# Altium PCB Arduino_Shield.PcbDoc
Units mil, origin at the board's own origin, x right, y up, seen from the top; angles counter-clockwise.
Board outline 2663 x 2733 mil, 4 copper layers (Component Side, gnd1, gnd2, Solder Side), stack 33.234 mil thick; 47 components, 62 nets, 197 pads, 35 vias.
Unrouted connection lines stored in the file: 5.
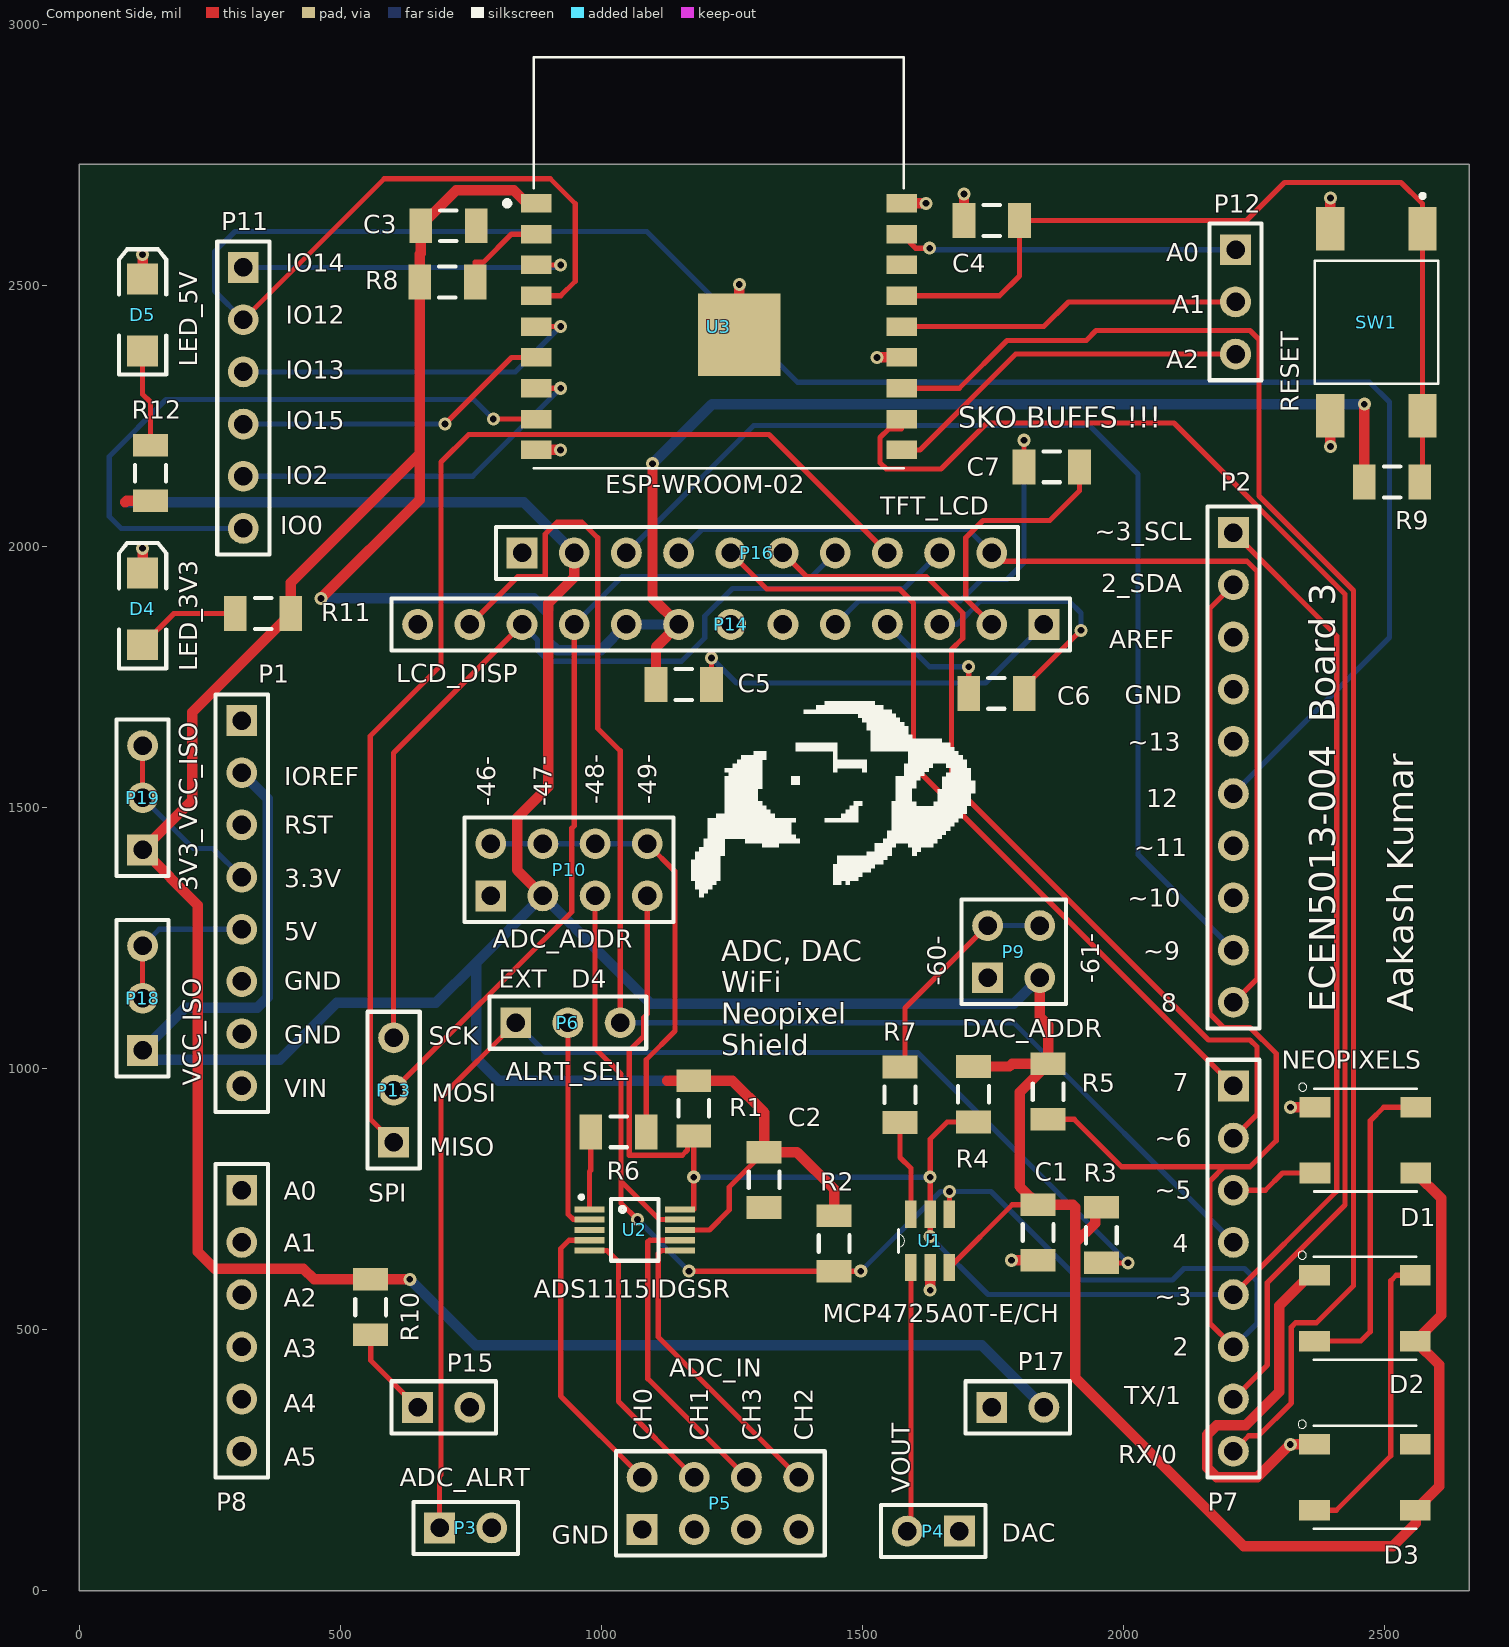
[diagram p0: Component Side view]
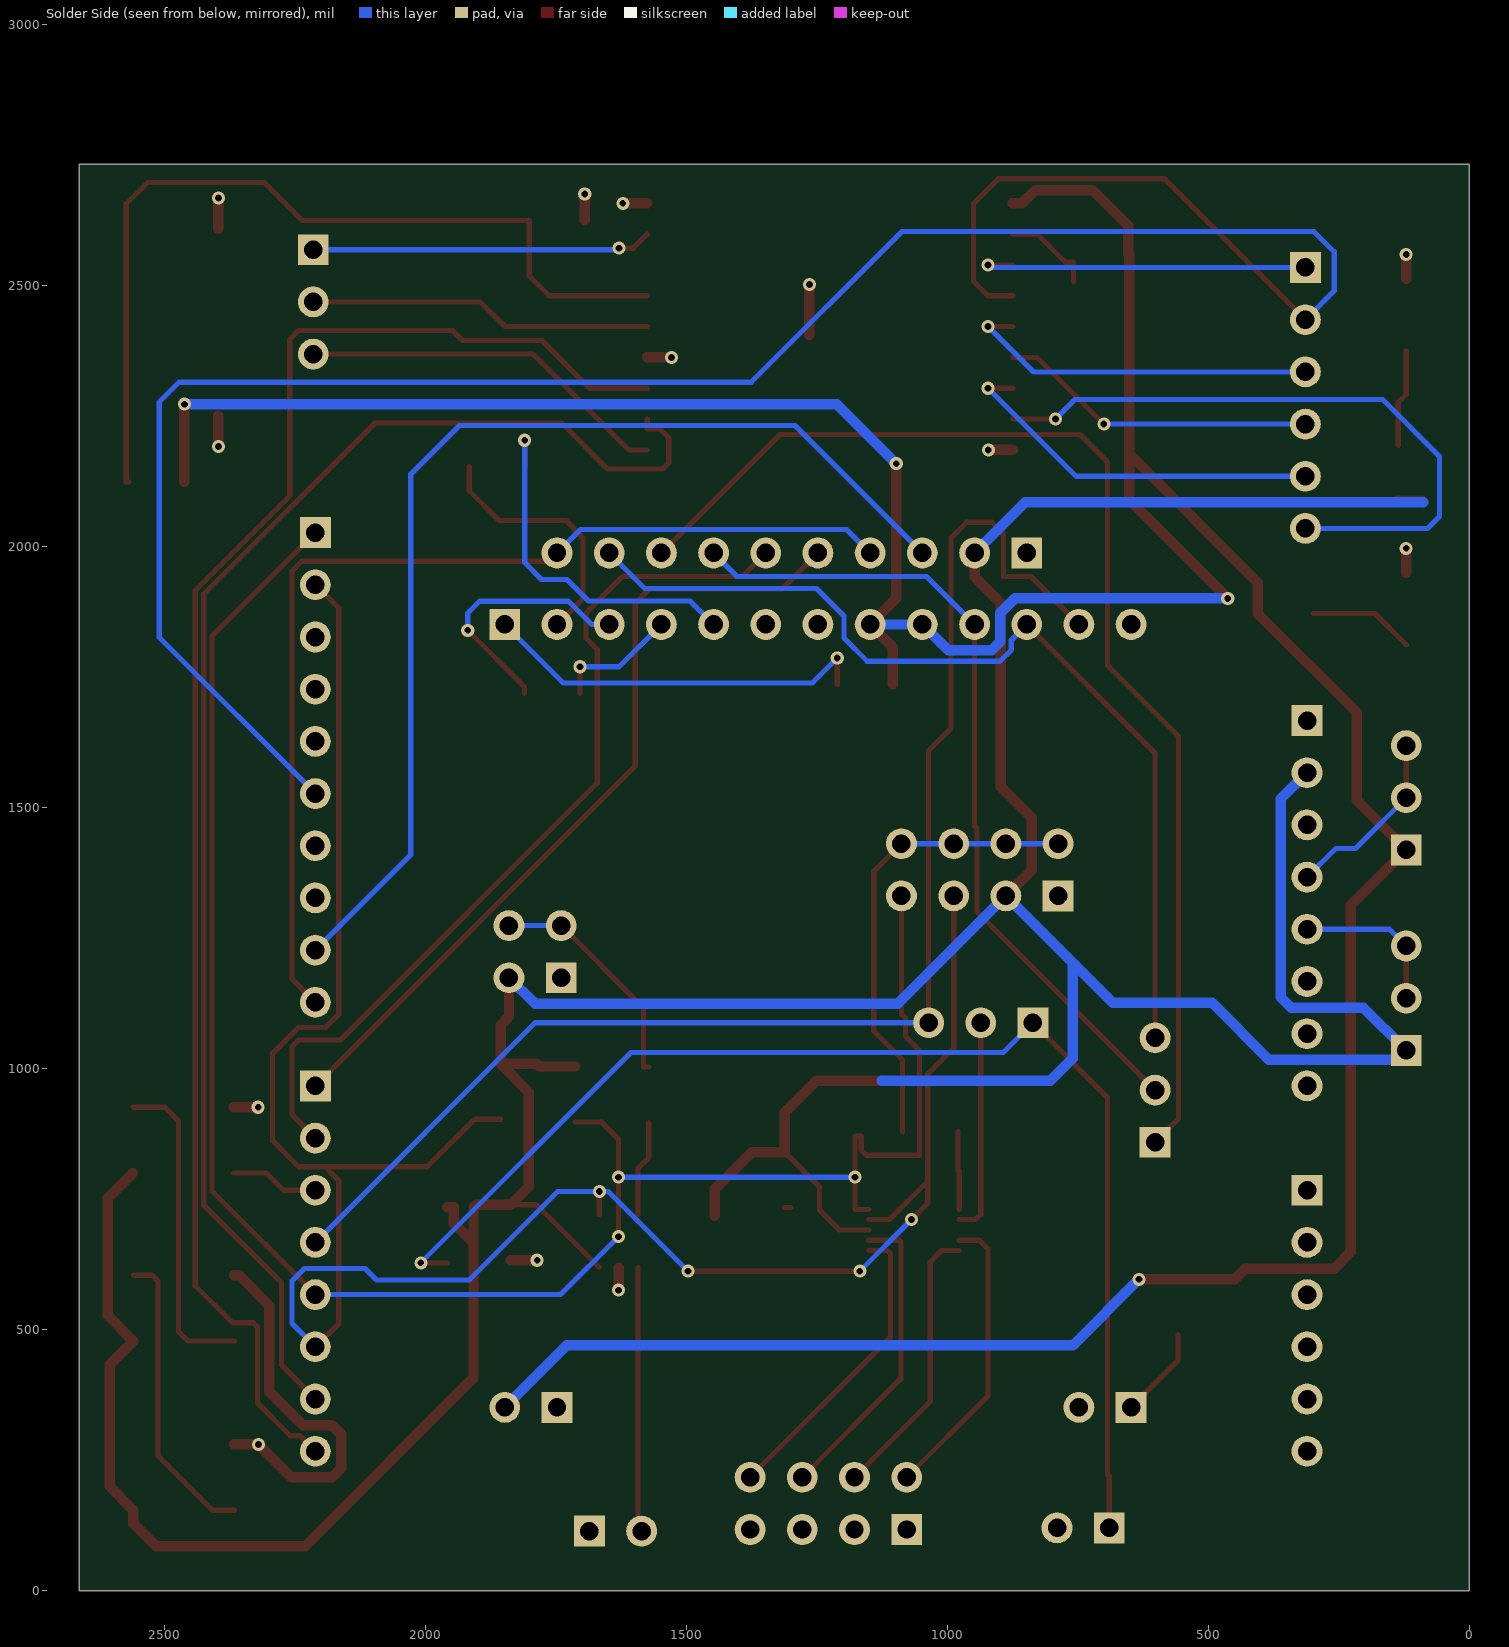
[diagram p1: Solder Side view, seen from below]
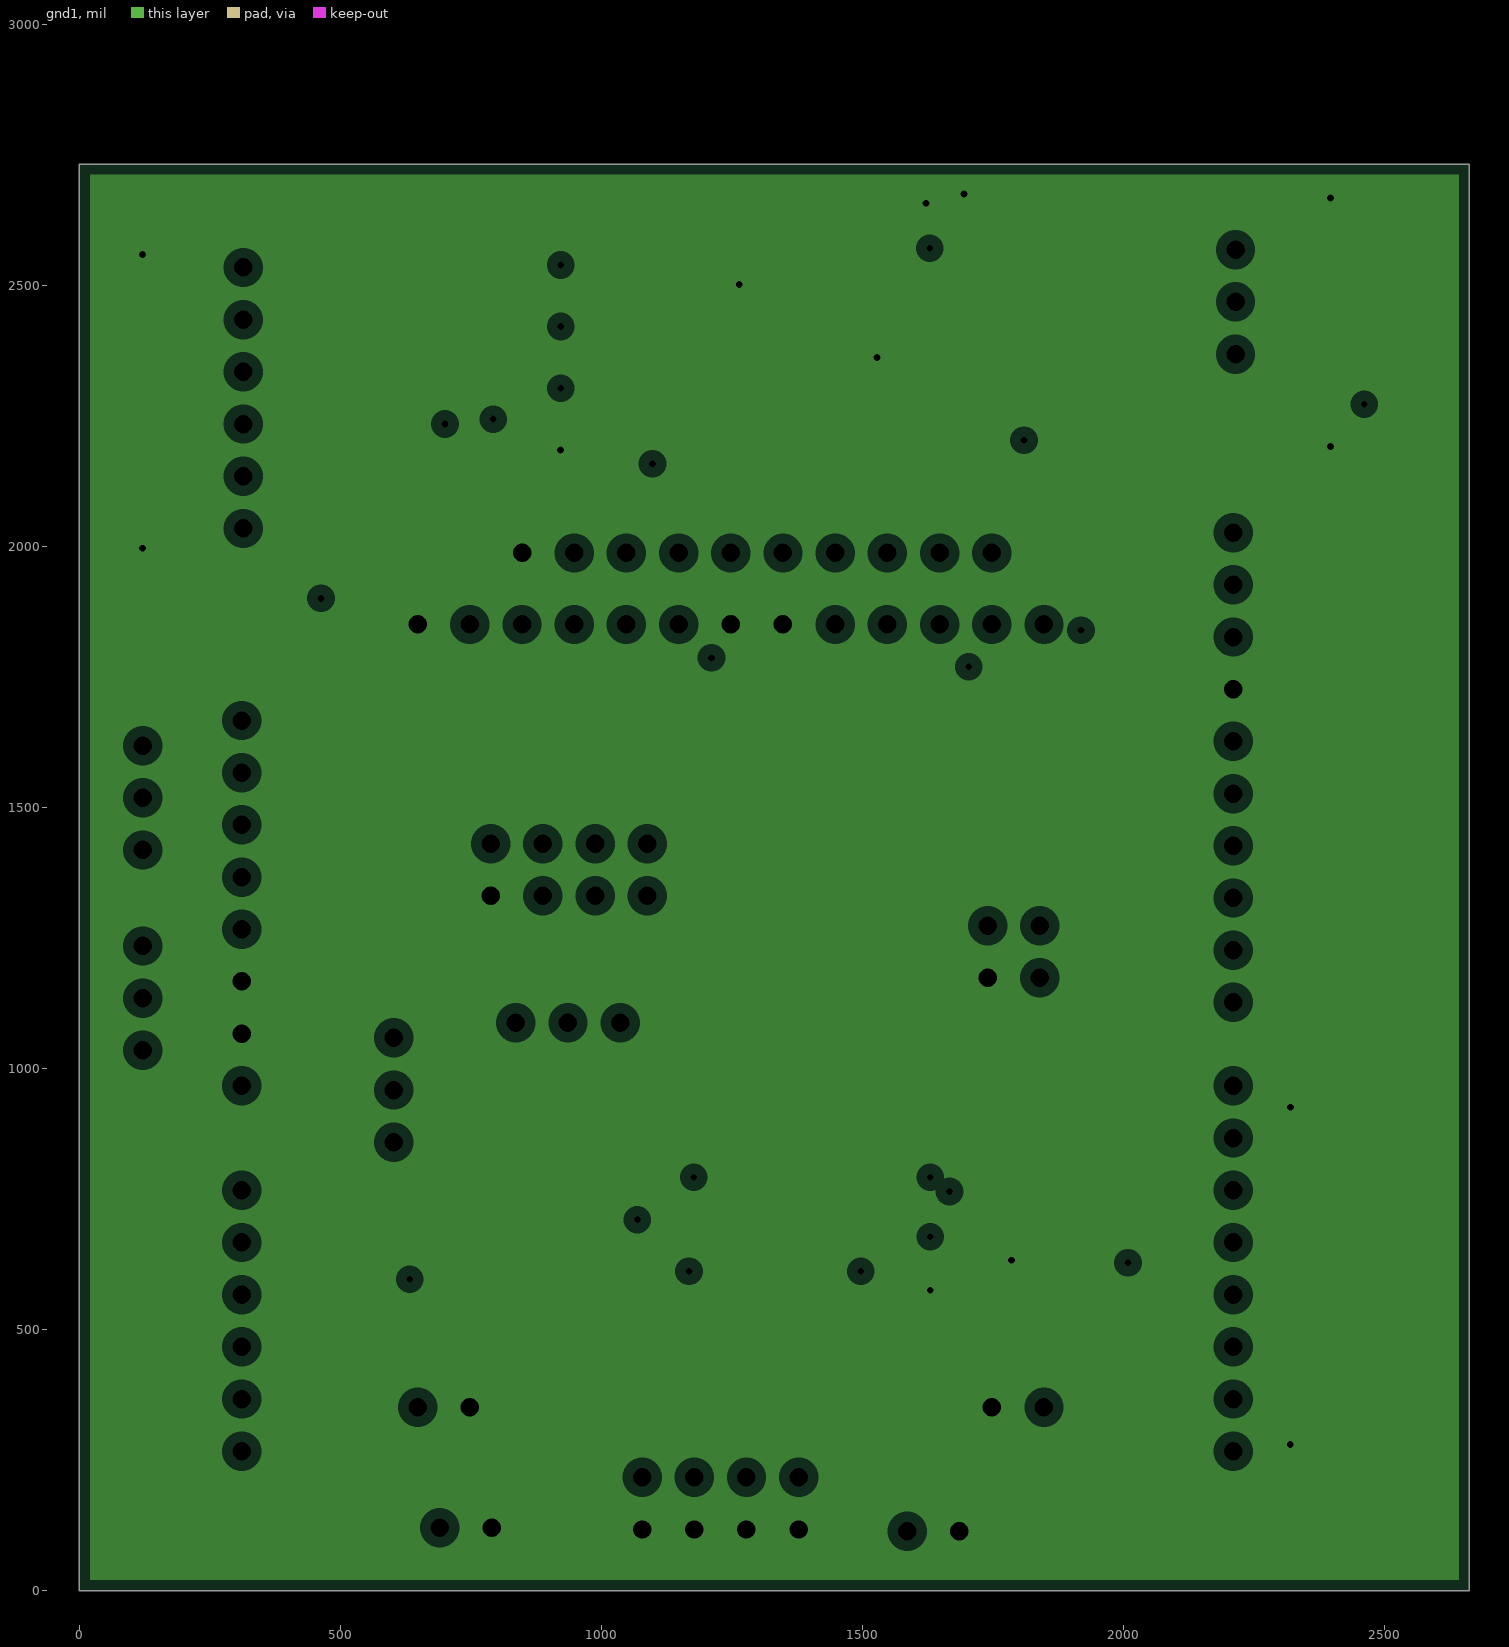
[diagram p2: gnd1, clearances drawn from the general rule]
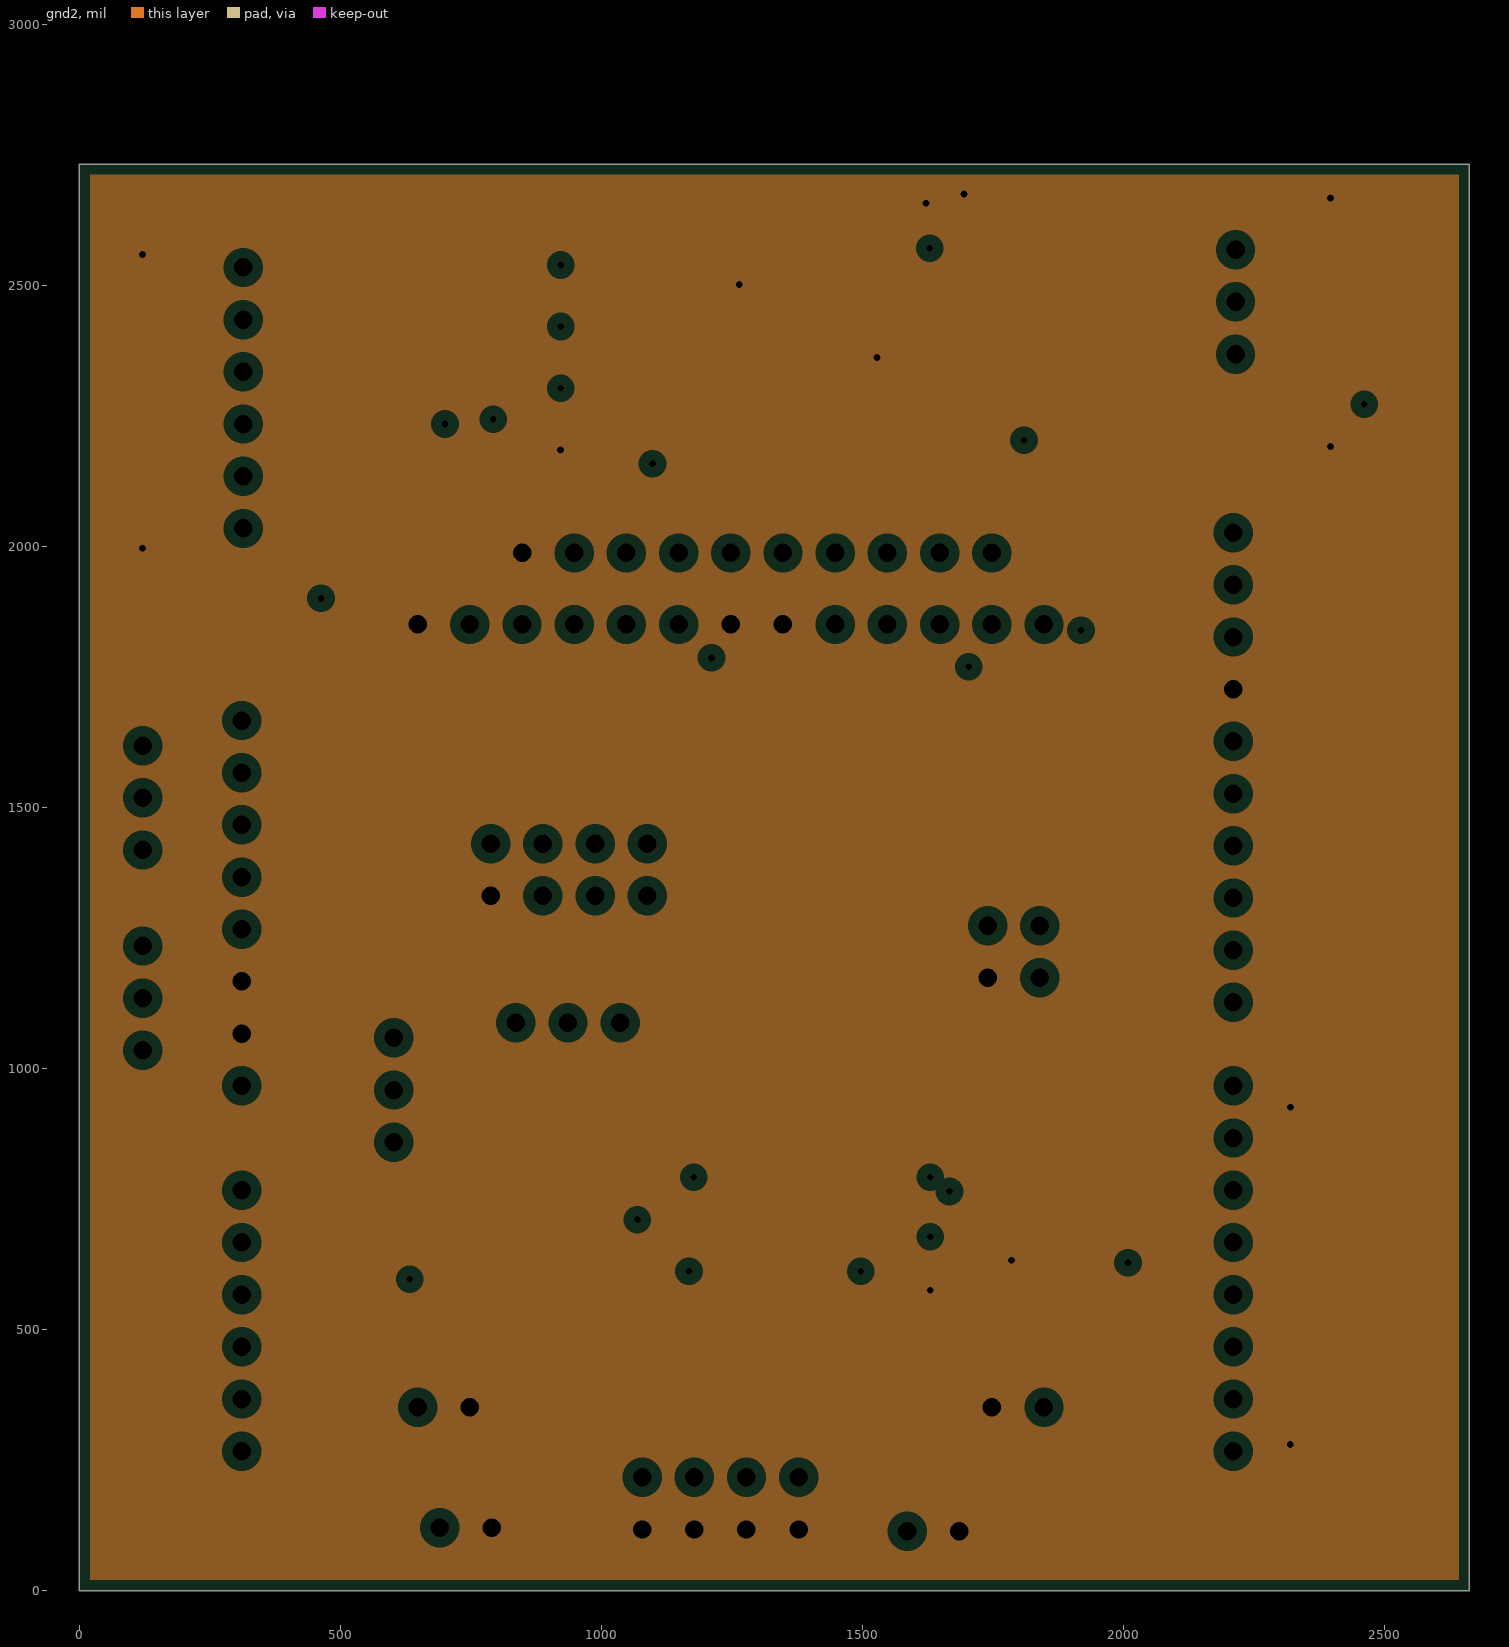
[diagram p3: gnd2, clearances drawn from the general rule]

## Layer stack, top to bottom
Top Solder: solder mask 0.4, Solder Resist, Dk 3.5
Component Side: signal copper 1.4
Dielectric 1: core 12.6, FR-4, Dk 4.8
gnd1: plane copper 1.417, net GND
Dielectric 3: prepreg 5, Dk 4.2
gnd2: plane copper 1.417, net GND
Dielectric 4: core 10, Dk 4.2
Solder Side: signal copper 1.4
Bottom Solder: solder mask 0.4, Solder Resist, Dk 3.5

## Board outline
0,0 2663,0 2663,2733 0,2733

## Design rules (kind name [scope] priority, off if disabled: settings)
Clearance [All] p1: gap=10 ignorepadtopadclearanceinfootprint=FALSE except(0: Arc-Hole Track-Hole SMDPad-Hole THPad-Hole Via-Hole Fill-Hole Poly-Hole Region-Hole Text-Hole; 6: Arc-Arc Arc-Track Arc-SMDPad Track-Track Track-SMDPad SMDPad-SMDPad)
PlaneClearance [All] p1: clearance=20
PlaneConnect [All] p1: planeconnectstyle=Relief reliefexpansion=20 reliefentries=4 reliefconductorwidth=10 reliefairgap=10
PolygonConnect [All] p1: connectstyle=Relief reliefconductorwidth=10 reliefentries=4 polygonreliefangle="90 Angle" airgapwidth=10
RoutingVias [All] p1: holewidth=13 width=25 viastyle="Through Hole" minholewidth=13 minwidth=25 maxholewidth=13 maxwidth=25
SolderMaskExpansion [All] p1: expansion=4
Width Width_1 [(InNet('3V3_VCC') OR InNet('VCC') OR InNet('GND') OR InNet('VIN'))] p1: maxlimit=20 minlimit=10 preferedwidth=20
Width [All] p2: maxlimit=10 minlimit=6 preferedwidth=10
28 further rules are at their usual default settings.

## Components (designator, comment, footprint, x,y, rotation, side; value= is the part's Value field where it differs from the comment)
C1 "Cap Semi" C1206 1837,686 r90 top value=22uF
C2 "Cap Semi" C1206 1312,787 r90 top value=22uF
C3 "Cap Semi" C1206 707,2615 r180 top value=22uF
C4 "Cap Semi" C1206 1748,2625 r0 top value=10uF
C5 "Cap Semi" C1206 1157.85,1736 r180 top value=1uF
C6 "Cap Semi" C1206 1757,1719 r180 top value=1uF
C7 "Cap Semi" C1206 1863,2153 r0 top value=1uF
D1 "LED_RGBW" *LED_IN-PI554FCH 2464,863 r0 top
D2 "LED_RGBW" *LED_IN-PI554FCH 2463,541 r0 top
D3 "LED_RGBW" *LED_IN-PI554FCH 2463,217 r0 top
D4 "LED_3V3" 3.2X1.6X1.1 121,1881 r90 top
D5 "LED_5V" 3.2X1.6X1.1 121,2444 r90 top
P1 "P4" HDR1X8 311,1667 r270 top
P2 "P1" HDR1X10 2211,2027 r270 top
P3 "ADC_ALRT" HDR1X2 690,120 r0 top
P4 "DAC" HDR1X2 1686,114 r180 top
P5 "ADC_IN" HDR2X4 1078,117 r0 top
P6 "ALRT_SEL" HDR1X3 836,1088 r0 top
P7 "P2" HDR1X8 2211,967 r270 top
P8 "P3" HDR1X6 311,767 r270 top
P9 "DAC_ADDR" HDR2X2 1740,1174 r0 top
P10 "ADC_ADDR" HDR2X4 788,1331 r0 top
P11 "Header 6" HDR1X6 314,2535 r270 top
P12 "Header 3" HDR1X3 2215,2569 r270 top
P13 "SPI" HDR1X3 602,859 r90 top
P14 "LCD_DISP" HDR1X13 1848,1851 r180 top
P15 "Header 2" HDR1X2 648,351 r0 top
P16 "TFT_LCD" HDR1X10 848,1988 r0 top
P17 "Header 2" HDR1X2 1748,351 r0 top
P18 "VCC_ISO" HDR1X3 121,1035 r90 top
P19 "3V3_VCC_ISO" HDR1X3 121,1419 r90 top
R1 "Res3" C1206 1177,924 r90 top value=10K
R2 "Res3" C1206 1446,665 r90 top value=10K
R3 "Res3" C1206 1958,681 r90 top value=10K
R4 "Res3" C1206 1713,951 r90 top value=10K
R5 "Res3" C1206 1856,956 r90 top value=10K
R6 "Res3" C1206 1033,879 r0 top value=10K
R7 "Res3" C1206 1572,950 r270 top value=10K
R8 "Res3" C1206 705,2507 r180 top value=10K
R9 "Res3" C1206 2515,2124 r180 top value=1k
R10 "Res3" C1206 558,543.15 r270 top value=28
R11 "Res3" C1206 352,1872 r0 top value=1K
R12 "Res3" C1206 136,2141 r270 top value=1K
SW1 "RESET" *TE_FSM4JSMA 2485,2430 r270 top
U1 "MCP4725A0T-E/CH" *SOT95P270X145-6N 1630,670 r90 top
U2 "ADS1115IDGSR" *SOP50P490X110-10N 1064,691 r0 top
U3 "ESP-WROOM-02" *MODULE_ESP-WROOM-02 1225,2465 r0 top

## Footprints (in the part's own frame and the unit in brackets; to place one, negate y for a bottom-side part, rotate by r counter-clockwise, add the part's x,y. Pads: shape width x height; smd on the part's side, far side on the other; paste and mask are expansions set on the pad)
3.2X1.6X1.1 [mm] "SMT LED; 2 Flat Leads"
  rect 1.5x1.5 smd: 1(-1.75,0) 2(1.75,0)
  silkscreen extent -2.9,-1.15 3.2,1.15
*LED_IN-PI554FCH [mm]
  rect 1.5x1 smd: 1(-2.45,1.6) 2(-2.45,-1.6) 3(2.45,-1.6) 4(2.45,1.6)
  silkscreen extent -3.25,-2.5 2.5,2.78
*MODULE_ESP-WROOM-02 [mm]
  rect 1.485x0.9 smd: 1(-8.892,4.9) 2(-8.892,3.4) 3(-8.892,1.9) 4(-8.892,0.4) 5(-8.892,-1.1) 6(-8.892,-2.6) 7(-8.892,-4.1) 8(-8.892,-5.6) 9(-8.892,-7.1) 10(8.892,-7.1) 11(8.892,-5.6) 12(8.892,-4.1) 13(8.892,-2.6) 14(8.892,-1.1) 15(8.892,0.4) 16(8.892,1.9) 17(8.892,3.4) 18(8.892,4.9)
  rect 4x4 smd: 19(1,-1.5)
  silkscreen extent -10.35,-8 9,12
*SOP50P490X110-10N [mm]
  rect 1.45x0.3 smd: 1(-2.2,1)
  rect 1.47x0.3 smd: 2(-2.2,0.5) 3(-2.2,0) 4(-2.2,-0.5) 5(-2.2,-1) 6(2.2,-1) 7(2.2,-0.5) 8(2.2,0) 9(2.2,0.5) 10(2.2,1)
  silkscreen extent -2.68,-1.5 1.15,1.68
*SOT95P270X145-6N [mil]
  rect 52x22 smd: 1(-51,37) 2(-51,0) 3(-51,-37) 4(51,-37) 5(51,0) 6(51,37)
  silkscreen extent -22,49 22,61
*TE_FSM4JSMA [mm]
  rect 2.1x1.38 smd: 1(-4.55,2.24) 2(4.55,2.24) 3(-4.55,-2.24) 4(4.55,-2.24)
  silkscreen extent -6.25,-3 3,3
C1206 [mm] "Chip Capacitor, Body 3.2x1.6mm, IPC High Density"
  rect 1.1x1.7 smd: 1(-1.35,0) 2(1.35,0)
  silkscreen extent -0.4,-0.75 0.4,0.75, body extent -1.7,-0.9 1.7,0.9, height 1.3
HDR1X2 [mm] "Connector; Header; 2 Position"
  rect 1.5x1.5 hole 0.9: 1(0,0)
  round 1.5 hole 0.9: 2(2.54,0)
  silkscreen extent -1.27,-1.27 3.81,1.27
HDR1X3 [mm] "Connector; Header; 3 Position"
  rect 1.5x1.5 hole 0.9: 1(0,0)
  round 1.5 hole 0.9: 2(2.54,0) 3(5.08,0)
  silkscreen extent -1.27,-1.27 6.35,1.27
HDR1X6 [mm] "Connector; Header; 6 Position"
  rect 1.5x1.5 hole 0.9: 1(0,0)
  round 1.5 hole 0.9: 2(2.54,0) 3(5.08,0) 4(7.62,0) 5(10.16,0) 6(12.7,0)
  silkscreen extent -1.27,-1.27 13.97,1.27
HDR1X8 [mm] "Connector; Header; 8 Position"
  rect 1.5x1.5 hole 0.9: 1(0,0)
  round 1.5 hole 0.9: 2(2.54,0) 3(5.08,0) 4(7.62,0) 5(10.16,0) 6(12.7,0) 7(15.24,0) 8(17.78,0)
  silkscreen extent -1.27,-1.27 19.05,1.27
HDR1X10 [mm] "Connector; Header; 10 Position"
  rect 1.5x1.5 hole 0.9: 1(0,0)
  round 1.5 hole 0.9: 2(2.54,0) 3(5.08,0) 4(7.62,0) 5(10.16,0) 6(12.7,0) 7(15.24,0) 8(17.78,0) 9(20.32,0) 10(22.86,0)
  silkscreen extent -1.27,-1.27 24.13,1.27
HDR1X13 [mm] "Connector; Header; 13 Position"
  rect 1.5x1.5 hole 0.9: 1(0,0)
  round 1.5 hole 0.9: 2(2.54,0) 3(5.08,0) 4(7.62,0) 5(10.16,0) 6(12.7,0) 7(15.24,0) 8(17.78,0) 9(20.32,0) 10(22.86,0) 11(25.4,0) 12(27.94,0) 13(30.48,0)
  silkscreen extent -1.27,-1.27 31.75,1.27
HDR2X2 [mm] "Connector; Header; 2x2 Position"
  rect 1.5x1.5 hole 0.9: 1(0,0)
  round 1.5 hole 0.9: 2(0,2.54) 3(2.54,0) 4(2.54,2.54)
  silkscreen extent -1.27,-1.27 3.81,3.81
HDR2X4 [mm] "Connector; Header; 4x2 Position"
  rect 1.5x1.5 hole 0.9: 1(0,0)
  round 1.5 hole 0.9: 2(0,2.54) 3(2.54,0) 4(2.54,2.54) 5(5.08,0) 6(5.08,2.54) 7(7.62,0) 8(7.62,2.54)
  silkscreen extent -1.27,-1.27 8.89,3.81

## Part data
C1 C2 C3 C4: "Capacitor (Semiconductor SIM Model)", DigiKeyPartNo=1276-1079-1-ND, LatestRevisionDate=29-May-2009, LatestRevisionNote="IPC-7351 Footprint Added.", PackageDescription="Chip Capacitor", PackageReference=C1206, Published=8-Jun-2000, Publisher="Altium Limited"
C5 C6 C7: "Capacitor (Semiconductor SIM Model)", DigiKeyPartNo=732-7692-1-ND, LatestRevisionDate=29-May-2009, LatestRevisionNote="IPC-7351 Footprint Added.", PackageDescription="Chip Capacitor", PackageReference=C1206, Published=8-Jun-2000, Publisher="Altium Limited"
D1 D2 D3: library part IN-PI554FCH, "5050RGB with integrated IC built in 4 PIN Viewing angle: 120 degrees", DigiKeyPartNo=1830-1209-1-ND, Package="SMD-4 Innolux", Availability=Unavailable, MF=Inolux, MP=IN-PI554FCH, Price=None, SnapEDA_Link=https://www.snapeda.com/parts/IN-PI554FCH/Inolux/view-part/?ref=snap
D4 D5: library part LED2, "Typical RED, GREEN, YELLOW, AMBER GaAs LED", LatestRevisionDate=17-Jul-2002, LatestRevisionNote="Re-released for DXP Platform.", PackageDescription="SM LED; 2 Flat Leads", PackageReference=3.2X1.6X1.1, PackageVersion=Feb-2002, Published=8-Jun-2000, Publisher="Altium Limited"
P1 P7: library part "Header 8", "Header, 8-Pin", DigiKeyPartNo=1568-1413-ND, LatestRevisionDate=17-Jul-2002, LatestRevisionNote="Re-released for DXP Platform.", Publisher="Altium Limited"
P2: library part "Header 10", "Header, 10-Pin", DigiKeyPartNo=1568-1413-ND, LatestRevisionDate=17-Jul-2002, LatestRevisionNote="Re-released for DXP Platform.", Publisher="Altium Limited"
P3 P4: library part "Header 2", "Header, 2-Pin", DigiKeyPartNo=732-5315-ND, LatestRevisionDate=17-Jul-2002, LatestRevisionNote="Re-released for DXP Platform.", Publisher="Altium Limited"
P5 P10: library part "Header 4X2", "Header, 4-Pin, Dual row", DigiKeyPartNo=952-2121-ND, LatestRevisionDate=17-Jul-2002, LatestRevisionNote="Re-released for DXP Platform.", Publisher="Altium Limited"
P6: library part "Header 3", "Header, 3-Pin", DigiKeyPartNo=732-5315-ND, LatestRevisionDate=17-Jul-2002, LatestRevisionNote="Re-released for DXP Platform.", Publisher="Altium Limited"
P8: library part "Header 6", "Header, 6-Pin", DigiKeyPartNo=1568-1413-ND, LatestRevisionDate=17-Jul-2002, LatestRevisionNote="Re-released for DXP Platform.", Publisher="Altium Limited"
P9: library part "Header 2X2", "Header, 2-Pin, Dual row", DigiKeyPartNo=952-2121-ND, LatestRevisionDate=17-Jul-2002, LatestRevisionNote="Re-released for DXP Platform.", Publisher="Altium Limited"
P11: "Header, 6-Pin", DigiKeyPartNo=1212-1179-ND, LatestRevisionDate=17-Jul-2002, LatestRevisionNote="Re-released for DXP Platform.", Publisher="Altium Limited"
P12: "Header, 3-Pin", DigiKeyPartNo=1212-1179-ND, LatestRevisionDate=17-Jul-2002, LatestRevisionNote="Re-released for DXP Platform.", Publisher="Altium Limited"
P13 P18 P19: library part "Header 3", "Header, 3-Pin", DigiKeyPartNo=1568-1413-ND, LatestRevisionDate=17-Jul-2002, LatestRevisionNote="Re-released for DXP Platform.", Publisher="Altium Limited"
P14: library part "Header 13", "Header, 13-Pin", DigiKeyPartNo=1212-1179-ND, LatestRevisionDate=17-Jul-2002, LatestRevisionNote="Re-released for DXP Platform.", Publisher="Altium Limited"
P15 P17: "Header, 2-Pin", DigiKeyPartNo=1212-1179-ND, LatestRevisionDate=17-Jul-2002, LatestRevisionNote="Re-released for DXP Platform.", Publisher="Altium Limited"
P16: library part "Header 10", "Header, 10-Pin", DigiKeyPartNo=1212-1179-ND, LatestRevisionDate=17-Jul-2002, LatestRevisionNote="Re-released for DXP Platform.", Publisher="Altium Limited"
R1 R2 R3 R4 R5 R6 R7 R8: "Resistor", DigiKeyPartNo=RMCF1206JT10K0CT-ND, LatestRevisionDate=29-May-2009, LatestRevisionNote="IPC-7351 Footprint Added.", PackageDescription="Chip Resistor", PackageReference=J1-0603, Published=8-Jun-2000, Publisher="Altium Limited"
R9: "Resistor", DigiKeyPartNo=RNCP1206FTD1K00CT-ND, LatestRevisionDate=29-May-2009, LatestRevisionNote="IPC-7351 Footprint Added.", PackageDescription="Chip Resistor", PackageReference=1206, Published=8-Jun-2000, Publisher="Altium Limited"
R10: "Resistor", DigiKeyPartNo=RMCF1206FT28R0, LatestRevisionDate=29-May-2009, LatestRevisionNote="IPC-7351 Footprint Added.", PackageDescription="Chip Resistor", PackageReference=J1-0603, Published=8-Jun-2000, Publisher="Altium Limited"
R11 R12: "Resistor", LatestRevisionDate=29-May-2009, LatestRevisionNote="IPC-7351 Footprint Added.", PackageDescription="Chip Resistor", PackageReference=J1-0603, Published=8-Jun-2000, Publisher="Altium Limited"
SW1: library part FSM4JSMA, "FSM4JSMA=SMT,TACTILE,PB SWITCH", DigiKeyPartNo=450-1759-1-ND, Package=None, Availability=Unavailable, EU_RoHS_Compliance=Compliant, MF="TE Connectivity", MP=FSM4JSMA, Price=None, SnapEDA_Link=https://www.snapeda.com/parts/FSM4JSMA/TE%20Connectivity%20ALCOSWITCH%20Switches/view-part/?ref=snap, TE_purchase_URL=https://www.te.com/usa-en/product-4-1437565-1.html?te_bu=Cor&te_type=disp&te_campaign=seda_glo_cor-seda-global-disp-prtnr-fy19-seda-model-bom-cta_sma-317_1&elqCampaignId=32493
U1: "MCP4725 Series 1 Ch I2C EEPROM Memory 5.5 V 12-Bit D/A Converter SMT - SOT-23-6", DigiKeyPartNo=MCP4725A0T-E/CHCT-ND, Package="SOT-23-6 Microchip", Availability=Unavailable, MF=Microchip, MP=MCP4725A0T-E/CH, Price=None, SnapEDA_Link=https://www.snapeda.com/parts/MCP4725A0T-E/CH/Microchip/view-part/?ref=snap
U2: "16-Bit ADC with Integrated MUX, PGA, Comparator, Oscillator, and Reference 10-VSSOP -40 to 125", DigiKeyPartNo=296-38849-1-ND, Package="MSOP-10 Texas Instruments", Availability=Unavailable, MF="Texas Instruments", MP=ADS1115IDGSR, Price=None, SnapEDA_Link=https://www.snapeda.com/parts/ADS1115IDGSR/Texas%20Instruments/view-part/?ref=snap
U3: "Wi-Fi Module w/ESP8266 802.11b/g/n 20dBm 20x18x3mm", DigiKeyPartNo=1904-1021-1-ND, Package="SMD-18 Espressif Systems", Availability=Unavailable, MF="Espressif Systems", MP=ESP-WROOM-02, Price=None, SnapEDA_Link=https://www.snapeda.com/parts/ESP-WROOM-02/Espressif%20Systems/view-part/?ref=snap

## Via types
v1: diameter 25, hole 13, Component Side to Solder Side, 35 vias

## Nets (pads, with @x,y where several pads share a name; then routed paths per layer and width w, separated by ;. In a path a pad name is that pad's centre, name@x,y a point inside that pad or via, vN(x,y) a via of type N, cw(c..) or ccw(c..) an arc to the next point about the centre after c; other vN are vias at no path point)
3V3_VCC: C3.2 C5.2 P14.8 P14.9 P17.2 P19.1 R8.2 R9.2 R10.1 R11.2 U3.1 | length 7390.6
  Component Side w20: v1(462.85,1901) 651.85,2090 651.85,2177.85 ; v1(633,596.3) R10.1 449.7,596.3 429,617 259,617 227,649 227,1313 P19.1 216,1514 216,1682.85 R11.2 405.15,1931.15 651.85,2177.85 ; U3.1 857.09,2657.91 832,2683 721.85,2683 C3.2 653.85,2562 651.85,2560 R8.2 651.85,2177.85 ; v1(1098,2159) 1098,1901 P14.8 1104.7,1807.7 C5.2 ; R9.2 v1(2461.85,2273)
  Solder Side w20: v1(462.85,1901) 870.47,1901 898.47,1873 898.47,1818 915,1801.47 998.47,1801.47 P14.9 P14.8 ; v1(633,596.3) 759.3,470 1729,470 P17.2 ; v1(1098,2159) 1212,2273 v1(2461.85,2273)
3V3_VCC_IN: P1.4 P19.2 P19.3 | length 353
  Component Side w10: P19.2 P19.3
  Solder Side w10: P19.2 218,1422 256,1422 P1.4
A0: P8.1
A1: P8.2
A2: P8.3
A3: P8.4
A4: P8.5
A5: P8.6
ADC_ADDR: P10.2 P10.4 P10.6 P10.8 R6.2 | length 896.7
  Component Side w10: R6.2 1086.15,1017.09 1141,1071.94 1141,1378 P10.8
  Solder Side w10: P10.2 P10.4 P10.6 P10.8
ADC_ALERT: P3.1 P6.1 R3.1 | length 2443.1
  Component Side w10: P3.1 690,219 693,222 693,945 P6.1 ; R3.1 2008.85,627.85 v1(2009,628)
  Solder Side w10: P6.1 893,1031 1606,1031 v1(2009,628)
AREF: P2.3
D0_RX: P7.8 U3.12 | length 3072.2
  Component Side w10: U3.12 1685.58,2303.58 1777,2395 1929,2395 1948,2414 2243,2414 2260,2397 2260,2097 2441,1916 2441,584 2370,513 2330,513 2322,505 2322,359.47 2259,296.47 2240.47,296.47 P7.8
D1_TX: P7.7 U3.11 | length 2813.6
  Component Side w10: U3.11 1575.1,2226 1551,2226 1534,2209 1534,2161 1546,2149 1651,2149 1739,2237 2097,2237 2425,1909 2425,739 2276.02,590.02 2276.02,432.02 P7.7
D2_SDA: P2.2 P7.6 P10.5 R2.1 R5.1 U1.4 U2.9 | length 4402.3
  Component Side w10: P10.5 988,1039 1037.49,989.51 1037.49,784.19 ; v1(1069,710.69) 1037.49,742.19 1037.49,784.19 ; U2.9 1111,710.69 1037.49,784.19 ; v1(1167.84,611.85) R2.1 v1(1497,611.85) ; U1.4 v1(1667,764.5) ; R5.1 1906,902.85 1996.85,812 2193,812 ; P7.6 2166,512 2166,785 2193,812 ; P2.2 2166,1882 2166,1105 2192,1079 2243,1079 2293,1029 2293,862 2243,812 2193,812
  Solder Side w10: v1(1069,710.69) v1(1167.84,611.85) ; v1(1497,611.85) 1649.65,764.5 v1(1667,764.5) 1746.5,764.5 1916,595 2094,595 2116,617 2232,617 2256,593 2256,512 P7.6
D3_SCL: P2.1 P7.5 P10.7 R1.1 R4.1 U1.5 U2.10 | length 3820.3
  Component Side w10: P10.7 1088,1105 1080.53,1097.53 1080.53,1061.53 1053.49,1034.49 1053.49,834 1155,834 1165,844 1165,870.85 R1.1 v1(1177,792) 1177,730.37 U2.10 ; v1(1630,678) U1.5 v1(1630,792) 1630,865 1662.85,897.85 R4.1 ; P7.5 2409,765 2409,1829 P2.1
  Solder Side w10: v1(1177,792) v1(1630,792) ; v1(1630,678) 1741,567 P7.5
D4: P6.3 P7.4 P14.12 | length 2682.6
  Component Side w10: P14.12 840,1943 892.53,1943 892.53,2024.53 915,2047 963,2047 993,2017 993,1652 1036,1609 P6.3
  Solder Side w10: P6.3 1790,1088 P7.4
D5-: D1.2 P7.3 | length 170.2
  Component Side w10: P7.3 2272,767 2305.01,800.01 D1.2
D6-: P7.2 P16.6 | length 1714.9
  Component Side w10: P16.6 1393,1943 1622.53,1943 1692.53,1873 1692.53,1824.53 1671,1803 1671,1547 2163,1055 2243,1055 2256,1042 2256,912 P7.2
D7: P7.1 P16.5 | length 1568.7
  Component Side w10: P16.5 1317,1919 1571,1919 1598,1892 1598,1580 P7.1
DAC_ADDR: P9.2 P9.4 R7.1 | length 446.3
  Component Side w10: R7.1 1582,1003.15 1582,1116 P9.2
  Solder Side w10: P9.2 P9.4
ESP_RST: C4.2 R9.1 SW1.1 SW1.2 U3.15 | length 1705.3
  Component Side w10: U3.15 1763,2480.75 1801.15,2518.9 C4.2 2236,2625 2309,2698 2532.19,2698 2573.19,2657 SW1.1 SW1.2 2573.19,2124 R9.1
GND: C1.1 C2.1 C3.1 C4.1 D1.1 D2.1 D3.1 D4.2 D5.2 P1.6 P1.7 P2.4 P3.2 P4.1 P5.1 P5.3 P5.5 P5.7 P9.1 P10.1 P14.6 P14.7 P14.13 P15.2 P16.1 P17.1 SW1.3 SW1.4 U1.2 U2.3 U3.9 U3.13 U3.18 U3.19 | length 1372.3
  Component Side w20: D4.2 v1(121,1996.93) ; D5.2 v1(121,2559.93) ; U3.9 v1(921.64,2185.47) ; U3.19 v1(1264.37,2502.19) ; v1(1528.36,2362.64) U3.13 ; U3.18 v1(1621.83,2657.91) ; v1(1630,575.5) U1.2 ; C4.1 v1(1694.85,2675.97) ; v1(1786.03,632.85) C1.1 ; v1(2320.52,925.99) D1.1 ; D3.1 v1(2320,280) 2257.01,217 2179,217 2161,235 2161,299 2179,317 2235,317 2299,381 2299,545.99 2357,603.99 D2.1 ; v1(2396.81,2192.03) SW1.4 ; SW1.3 v1(2396.81,2667.97)
IO0: P11.6 U3.8 | length 1260.1
  Component Side w10: v1(793,2244.53) U3.8
  Solder Side w10: P11.6 80,2035 57,2058 57,2173 166,2282 755.53,2282 v1(793,2244.53)
IO2: P11.5 U3.7 | length 724.9
  Component Side w10: U3.7 v1(922,2303.58)
  Solder Side w10: P11.5 753.42,2135 v1(922,2303.58)
IO8: P2.10 P16.4 P16.10 | length 2048.8
  Component Side w10: P16.10 1730.5,1988 1730.5,1972 2237,1972 2256,1953 2256,1172 P2.10
  Solder Side w10: P16.4 1193,2033 1703,2033 P16.10
IO9-: P2.9 P16.3 | length 2107.4
  Solder Side w10: P16.3 1292,2232 1935,2232 2028,2139 2028,1410 P2.9
IO10-: P2.8
IO11-: P2.7
IO12: P2.6 P11.2 U3.4 | length 4431.9
  Component Side w10: P11.2 584,2705 902,2705 950,2657 950,2508.75 922,2480.75 U3.4
  Solder Side w10: P11.2 259,2490 259,2565 298,2604 1087,2604 1376,2315 2472,2315 2510,2277 2510,1826 P2.6
IO13: P11.3 U3.5 | length 691.3
  Component Side w10: U3.5 921.69,2421.69 v1(922,2422)
  Solder Side w10: P11.3 835,2335 v1(922,2422)
IO13-: P2.5
IO14: P11.1 U3.3 | length 657.1
  Component Side w10: U3.3 v1(922,2539.8)
  Solder Side w10: P11.1 917.2,2535 v1(922,2539.8)
IO16: P12.1 U3.17 | length 652.3
  Component Side w10: U3.17 1601.96,2572 v1(1629,2572)
  Solder Side w10: v1(1629,2572) 1632,2569 P12.1
MISO: P13.1 P16.8 | length 2349
  Component Side w10: P13.1 557,904 557,1637 693,1773 693,2162 746,2215 1321,2215 P16.8
MOSI: P13.2 P14.10 P16.7 | length 1592.1
  Component Side w10: P13.2 943.47,1300.47 943.47,1460.47 948,1465 P14.10
  Solder Side w10: P14.10 1040,1943 1403,1943 P16.7
NetC5_1: C5.1 P14.1 | length 754.3
  Component Side w10: C5.1 v1(1211,1787)
  Solder Side w10: v1(1211,1787) 1259,1739 1736,1739 P14.1
NetC6_1: C6.1 P14.3 | length 497.9
  Component Side w10: C6.1 1810.15,1731 v1(1919,1839.85)
  Solder Side w10: P14.3 1681.47,1851 1726,1895.53 1896.47,1895.53 1919,1873 v1(1919,1839.85)
NetC6_2: C6.2 P14.4 | length 240.4
  Component Side w10: C6.2 v1(1703.85,1770)
  Solder Side w10: P14.4 1629,1770 v1(1703.85,1770)
NetC7_1: C7.1 P14.5 | length 696.2
  Component Side w10: C7.1 v1(1809.85,2204)
  Solder Side w10: P14.5 1493,1896 1687.47,1896 1728.91,1937.44 1777.44,1937.44 1809.85,1969.85 v1(1809.85,2204)
NetC7_2: C7.2 P14.2 | length 488.1
  Component Side w10: P14.2 1698,1901 1698,2017 1731,2050 1859,2050 1916.15,2107.15 C7.2
NetD1_4: D1.4 D2.2 | length 616.1
  Component Side w10: D2.2 2455,478.01 2473,496.01 2473,899.99 2499,925.99 D1.4
NetD2_4: D2.4 D3.2 | length 575.5
  Component Side w10: D3.2 2408,154.01 2512.43,258.44 2512.43,593.42 2523,603.99 D2.4
NetD4_1: D4.1 R11.1 | length 202.7
  Component Side w10: D4.1 180.9,1872 R11.1
NetD5_1: D5.1 R12.1 | length 187.2
  Component Side w10: D5.1 121,2292 136,2277 R12.1
NetP4_2: P4.2 U1.1 | length 507.9
  Component Side w10: P4.2 1593,121 U1.1
NetP5_2: P5.2 U2.4 | length 564.8
  Component Side w10: U2.4 938.32,671.32 922,655 922,373 P5.2
NetP5_4: P5.4 U2.5 | length 537.4
  Component Side w10: U2.5 1011,651.63 1033,629.63 1033,362 P5.4
NetP5_6: P5.6 U2.7 | length 592.5
  Component Side w10: U2.7 1092,671.32 1089,668.32 1089,406 P5.6
NetP5_8: P5.8 U2.6 | length 584.1
  Component Side w10: U2.6 1115,651.63 1109.1,645.73 1109.1,485.9 P5.8
NetP6_2: P6.2 U2.2 | length 412.7
  Component Side w10: P6.2 936,721 946.31,710.69 U2.2
NetP11_4: P11.4 U3.6 | length 613.8
  Component Side w10: v1(700.36,2235) 828,2362.64 U3.6
  Solder Side w10: P11.4 v1(700.36,2235)
NetP12_2: P12.2 U3.14 | length 659.5
  Component Side w10: U3.14 1847.69,2421.69 1895,2469 P12.2
NetP12_3: P12.3 U3.10 | length 715.9
  Component Side w10: U3.10 1610.47,2185.47 1794,2369 P12.3
NetP15_1: P15.1 R10.2 | length 176.3
  Component Side w10: R10.2 558,441 P15.1
NetR6_1: R6.1 U2.1 | length 149.7
  Component Side w10: U2.1 977.39,803 979.85,805.46 R6.1
NetR7_2: R7.2 U1.6 | length 184.5
  Component Side w10: R7.2 1572,830 1593,809 U1.6
NetR8_1: R8.1 U3.2 | length 177.1
  Component Side w10: R8.1 758.15,2545.15 774.15,2545.15 827.86,2598.86 U3.2
RST: P1.3
SCK: P13.3 P14.11 P16.9 | length 1845.1
  Component Side w10: P13.3 602,1605 P14.11
  Solder Side w10: P14.11 877.47,1821.53 877.47,1802 899,1780.47 1153.47,1780.47 1198,1825 1198,1867 1251,1920 1580,1920 P16.9
VCC: C1.2 C2.2 D1.3 D2.3 D3.3 P1.2 P9.3 P10.3 P16.2 P18.1 R1.2 R2.2 R3.2 R4.2 R5.2 R12.2 U1.3 U2.8 | length 8577.7
  Component Side w10: U2.8 1207,691 1245,729 1245,773.15 C2.2 ; U1.3 1787.15,739.15 C1.2
  Component Side w20: 88,2085 90.85,2087.85 R12.2 ; P10.3 838.47,1380.53 838.47,1480.53 898,1540.06 898,1891.58 948,1941.58 P16.2 ; 1126.15,977.15 R1.2 1250.85,977.15 1312,916 C2.2 1374.85,840.15 1446,769 R2.2 ; R4.2 1782,1004.15 1787,1009.15 R5.2 ; P9.3 1840,1099 1856,1083 R5.2 ; R3.2 1946,734.15 1946,704 1908,666 ; D1.3 2609,751.46 2609,527.55 D2.3 2605,432.46 2605,199.55 D3.3 2560,154.01 2560,129 2516,85 2230.79,85 1908,407.79 1908,666 ; R5.2 1802,955.15 1802,774.15 C1.2 1903,739.15 1908,734.15 1908,666
  Solder Side w20: 88,2085 851,2085 P16.2 ; P1.2 361,1517 361,1137 341,1117 203,1117 P18.1 139,1017 384,1017 493,1126 683,1126 760,1203 ; 1126.15,977.15 803,977.15 760,1020.15 760,1203 ; P9.3 1790,1124 1095,1124 P10.3 760,1203
VCC_IN: P1.5 P18.2 P18.3 | length 303.3
  Component Side w10: P18.2 P18.3
  Solder Side w10: P18.3 153,1267 P1.5
VIN: P1.8
pads on no net: D3.4 P1.1 U3.16
copper on no net: | length 12
  Component Side w10: 1300,733.85 1312,733.85

## Polygon pours and split planes (outlines as drawn)
GND on gnd1 (split plane): 2642.9,2712.9 2642.9,20.1 20.1,20.1 20.1,2712.9
GND on gnd2 (split plane): 2642.9,2712.9 2642.9,20.1 20.1,20.1 20.1,2712.9

## Silkscreen, mask and mechanical layers (free items; w line width, h text height)
Top Overlay:
  drawing of 5 lines, arcs and shapes, not listed
  text "A0" at 2082,2547 h35
  text "IO14" at 395,2527 h35
  text "A1" at 2093.66,2447 h35
  text "IO12" at 395,2427 h35
  text "A2" at 2082,2342 h35
  text "IO13" at 395,2322 h35
  text "SKO BUFFS !!!" at 1684,2228 h40
  text "IO15" at 395,2225 h35
  text "IO2" at 395,2120 h35
  text "IO0" at 385,2024 h35
  text "~3_SCL" at 1945,2012 h35
  text "2_SDA" at 1958,1913 h35
  text "AREF" at 1973,1805 h35
  text "GND" at 2003.17,1699 h35
  text "~13" at 2009,1609 h35
  text "IOREF" at 392,1543 h35
  text "-48-" at 1005,1507 h35 r90
  text "-49-" at 1105,1507 h35 r90
  text "-46-" at 797,1503 h35 r90
  text "-47-" at 905,1503 h35 r90
  text "12" at 2043.99,1501 h35
  text "RST" at 392,1450 h35
  text "~11" at 2020.66,1407 h35
  text "3.3V" at 392,1348 h35
  text "~10" at 2009,1310 h35
  text "5V" at 392,1246 h35
  text "~9" at 2038.16,1209 h35
  text "-61-" at 1954,1164 h35 r90
  text "-60-" at 1660,1159 h35 r90
  text "EXT   D4" at 803,1155 h35
  text "GND" at 392,1151 h35
  text "8" at 2073.15,1109 h35
  text "ECEN5013-004  Board 3 /  / Aakash Kumar" at 2556,1108 h50 r90
  text "GND" at 392,1048 h35
  text "SCK" at 669,1046 h35
  text "ADC, DAC / WiFi / Neopixel / Shield" at 1230,1026 h40
  text "NEOPIXELS" at 2304,1000 h35
  text "7" at 2095,957 h35
  text "VIN" at 392,945 h35
  text "MOSI" at 675,937 h35
  text "~6" at 2060.01,850 h35
  text "MISO" at 671,833 h35
  text "~5" at 2060.01,751 h35
  text "A0" at 391,749 h35
  text "A1" at 391,649 h35
  text "4" at 2095,648 h35
  text "~3" at 2060.01,547 h35
  text "A2" at 391,544 h35
  text "2" at 2095,450 h35
  text "A3" at 391,447 h35
  text "TX/1" at 2001.7,357 h35
  text "A4" at 391,342 h35
  text "CH0" at 1097,287 h35 r90
  text "CH1" at 1205,287 h35 r90
  text "CH3" at 1305,287 h35 r90
  text "CH2" at 1405,287 h35 r90
  text "RX/0" at 1990.03,244 h35
  text "A5" at 391,239 h35
  text "VOUT" at 1591,186 h35 r90
  text "GND" at 905,90 h35
  text "A0" at 513,-945 h35
  text "~3_SCL" at 2375.2,-952 h35
  text "A1" at 513,-1045 h35
  text "2_SDA" at 2410.19,-1052 h35
  text "A2" at 513,-1150 h35
  text "AREF" at 2445.18,-1157 h35
  text "A3" at 513,-1247 h35
  text "GND" at 2480.17,-1262 h35
  text "A4" at 513,-1352 h35
  text "~13" at 2486,-1352 h35
  text "A5" at 513,-1455 h35
  text "12" at 2520.99,-1460 h35
  text "~11" at 2497.66,-1554 h35
  text "~10" at 2486,-1651 h35
  text "~9" at 2515.16,-1752 h35
  text "8" at 2550.15,-1852 h35
outline:
  lines w10: -1,0 -1,2732 2662,2732 2662,0 -1,0
Drill Drawing:
  circle w10: c296.57,3753.33 r33.33
  lines w10: 263.24,3570 329.9,3570 329.9,3636.67 263.24,3636.67 263.24,3570
  lines w15: 203.45,3525 7443.48,3525 ; 203.45,3825 7443.48,3825 ; 754.32,3375 754.32,3975 ; 1344.17,3375 1344.17,3975 ; 2443.85,3375 2443.85,3975 ; 2949.72,3375 2949.72,3975 ; 3683.52,3375 3683.52,3975 ; 5413,3375 5413,3975 ; 6002.85,3375 6002.85,3975 ; 6748.65,3375 6748.65,3975 ; 203.45,3375 7443.48,3375 7443.48,3975 203.45,3975 203.45,3375
  text "Symbol" at 293.45,3870 h72
  text "Count" at 799.32,3870 h72
  text "Hole Size" at 1389.17,3870 h72
  text "Plated" at 2488.85,3870 h72
  text "Hole Type" at 2994.72,3870 h72
  text "Drill Layer Pair" at 3728.52,3870 h72
  text "Via/Pad" at 5458,3870 h72
  text "Pad Shape" at 6047.85,3870 h72
  text "Template" at 6793.65,3870 h72
  text "35" at 799.32,3720 h60
  text "13.00mil (0.330mm)" at 1389.17,3720 h60
  text "PTH" at 2488.85,3720 h60
  text "Round" at 2994.72,3720 h60
  text "Component Side - Solder Side" at 3728.52,3720 h60
  text "Via" at 5458,3720 h60
  text "Rounded" at 6047.85,3720 h60
  text "v64h33" at 6793.65,3720 h60
  text "104" at 799.32,3570 h60
  text "35.43mil (0.900mm)" at 1389.17,3570 h60
  text "PTH" at 2488.85,3570 h60
  text "Round" at 2994.72,3570 h60
  text "Component Side - Solder Side" at 3728.52,3570 h60
  text "Pad" at 5458,3570 h60
  text "(Mixed)" at 6047.85,3570 h60
  text "(Mixed)" at 6793.65,3570 h60
  text "139 Total" at 799.32,3420 h60

## Dimensions
311,267 to 602,859 on Mechanical 4
2663,0 to 2663,2733 on Mechanical 4
2663,0 to 0,0 on Mechanical 4
311,767 to 2211,967 on Mechanical 4
602,859 to 311,767 on Mechanical 4
311,967 to 311,767 on Mechanical 4
2211,1127 to 2211,967 on Mechanical 4